# EAGLE board berry_3.0 (EAGLE 6.5.0)
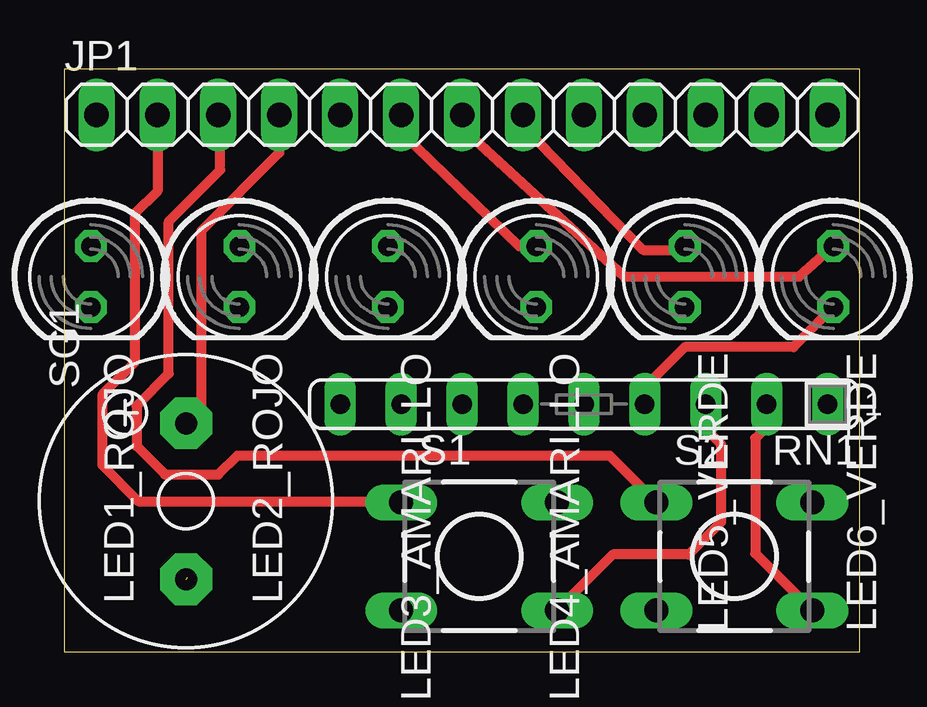
[diagram p0: board, top side]
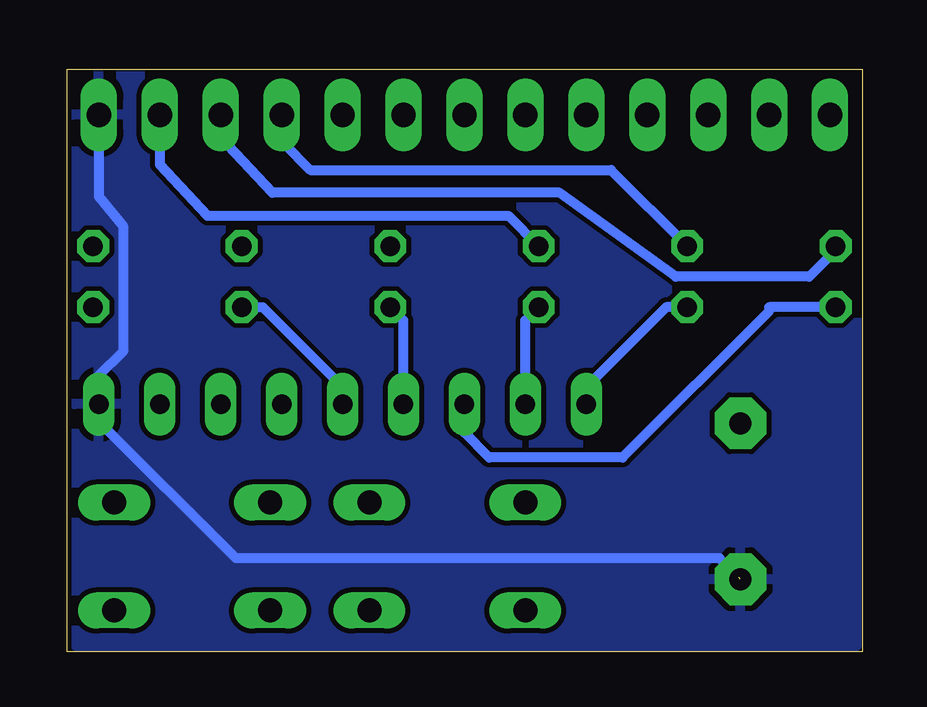
[diagram p1: board, bottom side, seen from below]

No outline drawn. Coordinates in mm, seen from the top.
Copper layers (1*16): Top 0.035mm / dielectric 1.5mm / Bottom 0.035mm
Design rules "default": minimum track width 10mil, minimum drill 24mil, track to track 8mil, track to pad 8mil, pad to pad 8mil, via to via 8mil, smd to smd 8mil, copper to edge 40mil, drill to drill 8mil, minimum pad ring 10mil, minimum via ring 8mil, stop-mask expansion 4mil, vias tented up to drill 0mil, thermal gap 10mil
Milling: 4 lines

## Footprints (pad centres in the part's own frame; a part is rotated, then mirrored left to right if it is on the bottom)
1X13 = drill 1.016 long: 1 -15.24,0; 2 -12.7,0; 3 -10.16,0; 4 -7.62,0; 5 -5.08,0; 6 -2.54,0; 7 0,0; 8 2.54,0; 9 5.08,0; 10 7.62,0; 11 10.16,0; 12 12.7,0; 13 15.24,0
LED5MM = drill 0.813 octagon: A -1.27,0; K 1.27,0
SIL9 = drill 0.813 long: 1 -10.16,0; 2 -7.62,0; 3 -5.08,0; 4 -2.54,0; 5 0,0; 6 2.54,0; 7 5.08,0; 8 7.62,0; 9 10.16,0
DTS-6 = drill 1 long: 1 -3.25,2.25; 2 3.25,2.25; 3 -3.25,-2.25; 4 3.25,-2.25
F/QMX = drill 0.914 pad 2.159 octagon: + 3.251,0; - -3.251,0

## Placement (x,y rotation side)
JP1  GPIO linea inferior  [1X13]  16.59,22.38 0 top
LED1_ROJO  [LED5MM]  1.11,15.64 270 top
LED2_ROJO  [LED5MM]  7.3,15.64 270 top
LED3_AMARILLO  [LED5MM]  13.49,15.64 270 top
LED4_AMARILLO  [LED5MM]  19.68,15.64 270 top
LED5_VERDE  [LED5MM]  25.88,15.64 270 top
LED6_VERDE  [LED5MM]  32.07,15.64 270 top
RN1  330  [SIL9]  21.67,10.32 180 top
S1  DTS-6  [DTS-6]  17.3,3.97 0 top
S2  DTS-6  [DTS-6]  27.94,3.97 0 top
SG1  F/QMX  [F/QMX]  5.08,6.27 90 top

## Library data of the parts
JP1 = pinhead
LED1_ROJO LED2_ROJO LED3_AMARILLO LED4_AMARILLO LED5_VERDE LED6_VERDE = led
RN1 = resistor-sil; OC_FARNELL: unknown; OC_NEWARK: unknown
S1 S2 = switch-tact
SG1 = buzzer; OC_FARNELL: unknown; OC_NEWARK: unknown

## Nets
GND: JP1.13 RN1.1 SG1.-
N$1: LED5_VERDE.K RN1.5
N$2: JP1.2 S1.1
N$4: LED3_AMARILLO.K RN1.8
N$6: JP1.10 LED2_ROJO.A
N$7: LED4_AMARILLO.K RN1.6
N$8: LED2_ROJO.K RN1.9
N$9: JP1.4 SG1.+
N$10: LED1_ROJO.K RN1.7
N$12: LED6_VERDE.K RN1.4
N$13: JP1.7 LED6_VERDE.A
N$14: JP1.8 LED5_VERDE.A
N$15: RN1.2 S2.4
N$16: RN1.3 S1.4
N$17: JP1.11 LED1_ROJO.A
N$18: JP1.3 S2.1
N$19: JP1.6 LED4_AMARILLO.A
N$20: JP1.12 LED3_AMARILLO.A

## Tracks (layer width: path | path; a pad name or v marks a point on that pad's centre or on a via)
GND  (1 unrouted)
  Bottom 0.406: JP1.13 31.83,18.97 30.8,17.7 30.8,12.54 31.83,11.51 RN1.1 31.83,9.6 26.11,3.89 5.95,3.89 5.16,3.1
  pour Bottom: 0.24,23.97 32.78,23.97 32.78,0.24 0.24,0.24
N$1
  Bottom 0.406: LED5_VERDE.K 25,14.37 21.75,11.11 21.75,10.4 RN1.5
N$2
  Top 0.406: JP1.2 3.89,19.21 2.94,18.26 2.94,12.06 1.59,10.72 1.59,7.78 3.1,6.27 14,6.27 S1.1
N$4
  Bottom 0.406: RN1.8 14.05,13.81 LED3_AMARILLO.K
N$6
  Bottom 0.406: JP1.10 24.13,21.19 23.02,20.08 10.48,20.08 LED2_ROJO.A
N$7
  Bottom 0.406: RN1.6 19.13,13.81 LED4_AMARILLO.K
N$8
  Bottom 0.406: LED2_ROJO.K 8.18,14.37 11.51,11.03 RN1.9
N$9
  Top 0.406: JP1.4 8.97,20.8 5.71,17.54 5.71,10.16 SG1.+
N$10
  Bottom 0.406: LED1_ROJO.K 3.89,14.37 3.89,14.21 10,8.1 15.56,8.1 16.59,9.13 RN1.7
N$12
  Top 0.406: LED6_VERDE.K 30.4,12.7 25.88,12.7 24.21,11.03 RN1.4
N$13
  Top 0.406: JP1.7 16.59,21.83 23.34,15.64 30.64,15.64 LED6_VERDE.A
N$14
  Top 0.406: JP1.8 19.21,21.83 24.13,16.75 25.72,16.75 LED5_VERDE.A
N$15
  Top 0.406: RN1.2 29.29,9.37 28.81,8.89 28.81,4.1 S2.4
N$16
  Top 0.406: RN1.3 26.75,9.29 27.38,8.65 27.38,5.4 26.04,4.05 22.88,4.05 S1.4
N$17
  Bottom 0.406: LED1_ROJO.A 1.11,16.75 2.22,15.64 7.78,15.64 12.62,19.13 24.61,19.13 26.75,21.43 JP1.11
N$18
  Top 0.406: S2.1 22.73,8.18 7.22,8.18 6.43,7.38 4.21,7.38 3.02,8.57 3.02,10.24 4.37,11.59 4.37,17.94 6.51,20.08 6.51,22.3 JP1.3
N$19
  Top 0.406: JP1.6 14.05,21.67 18.97,16.91 LED4_AMARILLO.A
N$20
  Bottom 0.406: JP1.12 29.29,20.32 27.3,18.18 14.76,18.18 LED3_AMARILLO.A